# Altium PCB PCB1.PcbDoc
Units mil, origin at the board's own origin, x right, y up, seen from the top; angles counter-clockwise.
Board outline 8325 x 3160 mil, 2 copper layers (Top Layer, Bottom Layer); 381 components, 240 nets, 1579 pads, 6 vias.
Unrouted connection lines stored in the file: 1014.
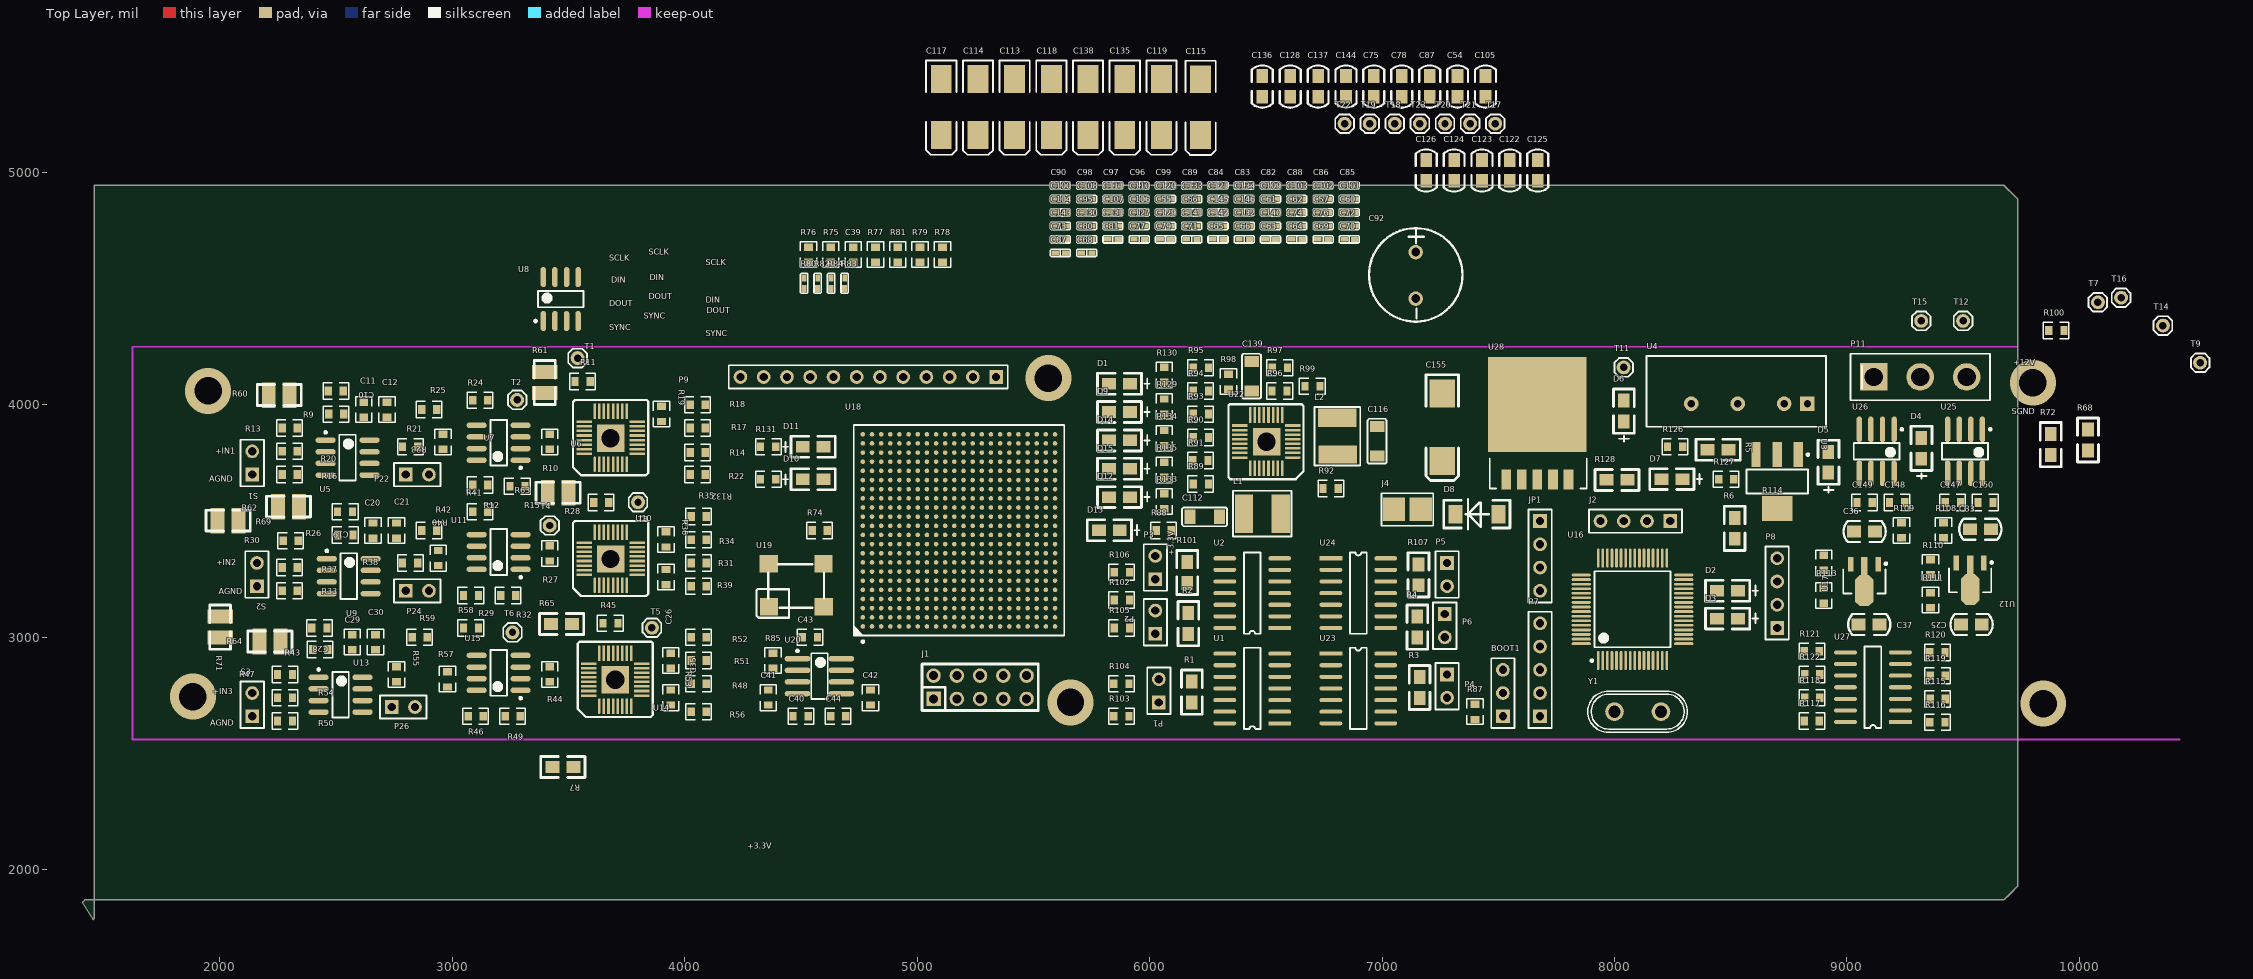
[diagram p0: Top Layer view]
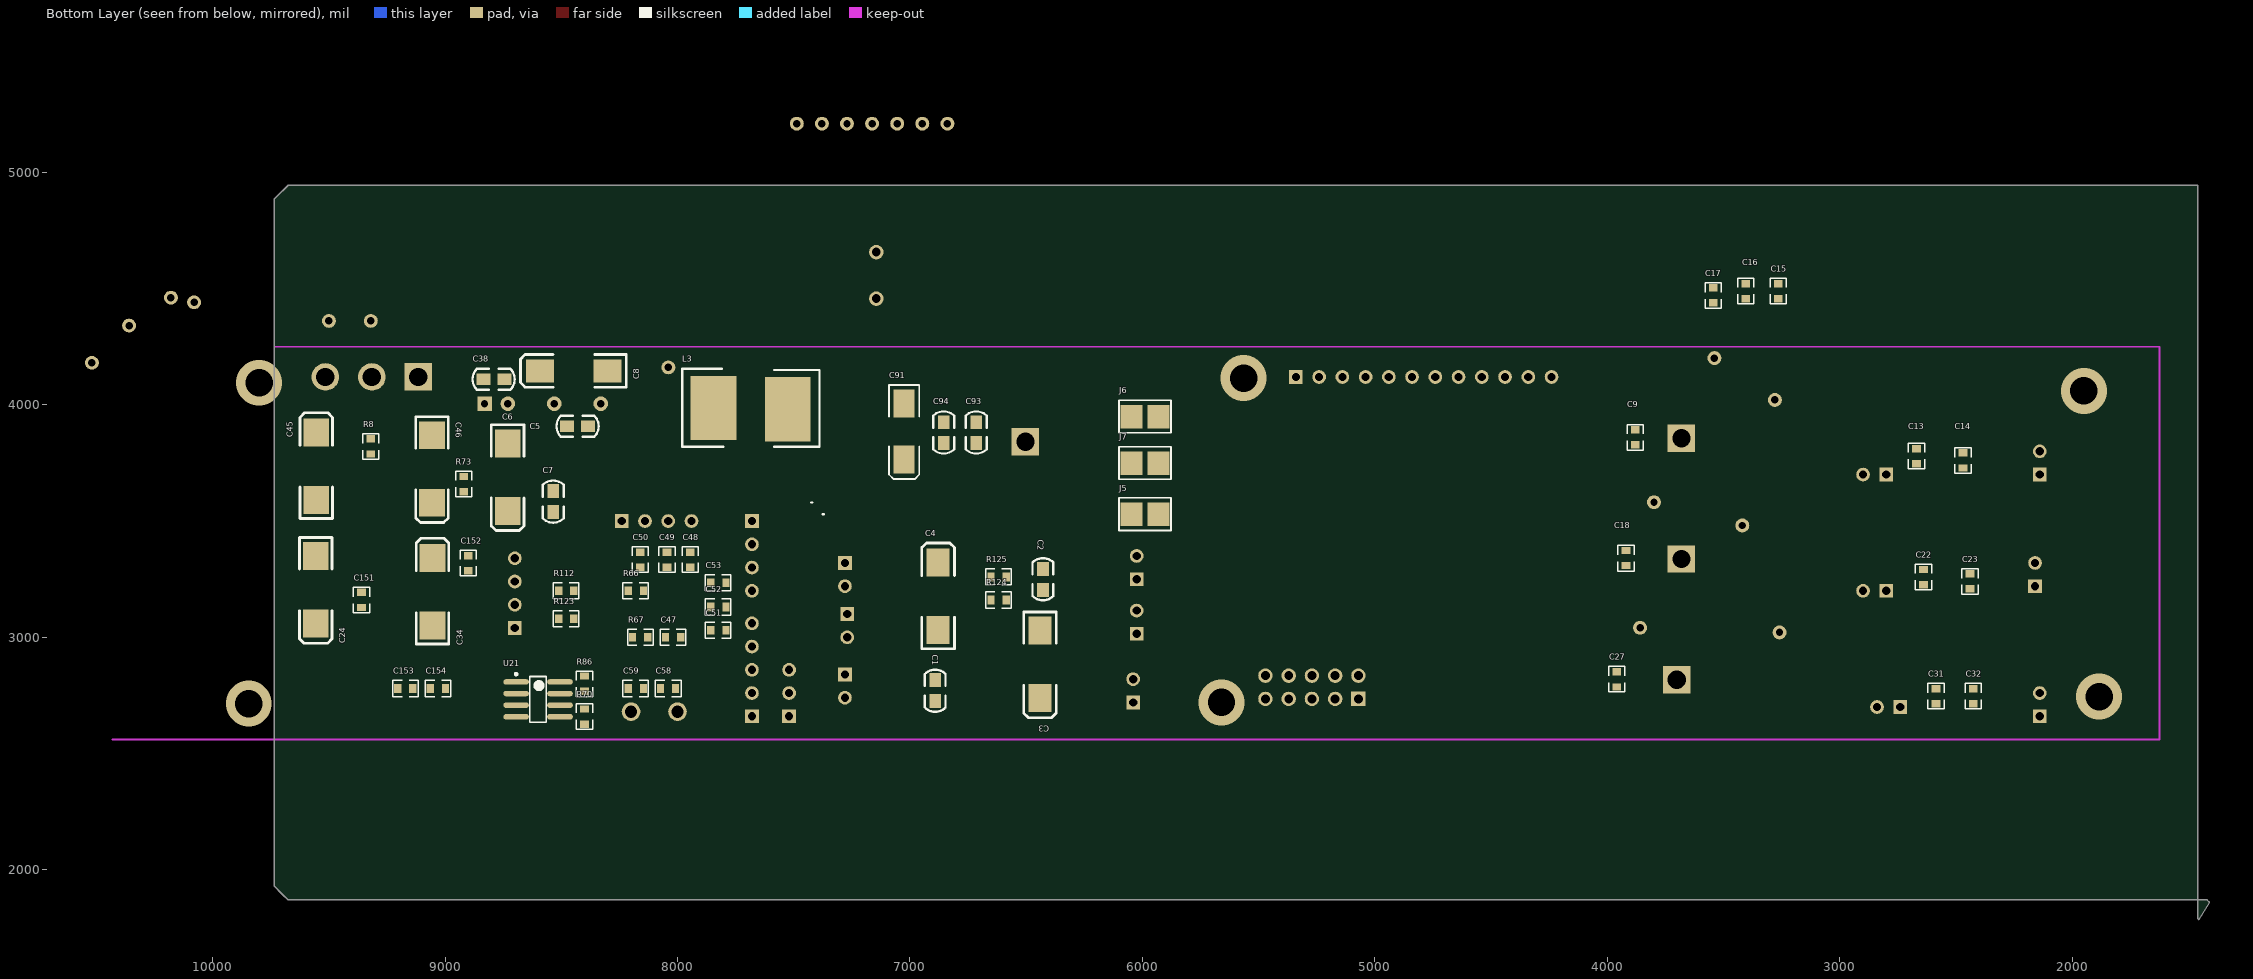
[diagram p1: Bottom Layer view, seen from below]

## Layer stack, top to bottom
Top Layer: signal copper 1.4
Dielectric: dielectric 12.6, FR-4, Dk 4.8
Bottom Layer: signal copper 1.4

## Board outline
1455,1785 1460,1790 1460,4945 9675,4945 9725,4895 9735,4885 9735,3355 9735,1930 9700,1895 9675,1870 8915,1870 1420,1870 1410,1860

## Design rules (kind name [scope] priority, off if disabled: settings)
Clearance [All] p1: gap=10
PolygonConnect [All] p1: connectstyle=Relief reliefconductorwidth=10 reliefentries=4 polygonreliefangle="90 Angle"
RoutingVias [All] p1: holewidth=28 width=50 viastyle="Through Hole" minholewidth=14 minwidth=28 maxholewidth=28 maxwidth=50
SilkToSilkClearance [All] p1 off: silktosilkclearance=10
SilkscreenOverComponentPads [All] p1 off: minsilkscreentomaskgap=10
SolderMaskExpansion [All] p1: expansion=4
Width [All] p1: maxlimit=100 minlimit=8 preferedwidth=10
26 further rules are at their usual default settings.

## Classes and differential pairs
component class 485Driver_MAX3462: C1 C2 C3 C4 P1 P2 P3 P4 P5 P6 R1 R2 R3 R4 R101 R102 R103 R104 R105 R106 R107 R124 R125 R? U1 U2 U23 U24
component class EP3CE75F484: C39 C40 C41 C42 C43 C44 D1 D9 D10 D11 D12 D13 D14 D15 J1 P9 R74 R75 R76 R77 R78 R79 R80 R81 R82 R83 R84 R85 R88 R129 R130 R131 R132 R133 R134 R135 T12 T14 T15 T16 U18 U19 U20
component class CH1_CH2: C9 C10 C11 C12 C13 C14 C15 C16 C17 C18 C19 C20 C21 C22 C23 C26 P22 P23 P24 P25 R9 R10 R11 R12 R13 R14 R15 R16 R17 R18 R19 R20 R21 R22 R23 R24 R25 R26 R27 R28 R29 R30 R31 R32 R33 R34 R35 R36 R37 R38 R39 R40 R41 R42 S1 S2 T1 T2 T3 T4 U5 U6 U7 U8 U9 U10 U11
component class CH3: C27 C28 C29 C30 C31 C32 C35 P26 P27 R43 R44 R45 R46 R47 R48 R49 R50 R51 R52 R53 R54 R55 R56 R57 R58 R59 S3 T5 T6 U13 U14 U15
component class Power: C5 C6 C7 C8 C24 C25 C33 C34 C36 C37 C38 C45 C46 C147 C148 C149 C150 C155 D4 D5 D6 D7 D8 L3 P11 R5 R6 R7 R8 R60 R61 R62 R63 R64 R65 R68 R69 R71 R72 R73 R108 R109 R126 R127 R128 T7 T9 T10 T11 U3 U4 U12 U17 U25 U26 U28
component class STM32F103RBT6: BOOT1 C47 C48 C49 C50 C51 C52 C53 C58 C59 C151 C152 C153 C154 D2 D3 J2 J3 JP1 P7 P8 R66 R67 R70 R86 R87 R110 R111 R112 R113 R114 R115 R116 R117 R118 R119 R120 R121 R122 R123 U16 U21 U27 Y1
component class FPGA_POWER: C54 C55 C56 C57 C60 C61 C62 C63 C64 C65 C66 C67 C68 C69 C70 C71 C72 C73 C74 C75 C76 C77 C78 C79 C80 C81 C82 C83 C84 C85 C86 C87 C88 C89 C90 C91 C92 C93 C94 C95 C96 C97 C98 C99 C100 C101 C102 C103 C104 C105 C106 C107 C108 C109 C110 C111 C112 C113 C114 C115 C116 C117 C118 C119 C120 C121 C122 C123 C124 C125 C126 C127 C128 C129 C130 C131 C132 C133 C134 C135 C136 C137 C138 C139 C140 C141 C142 C143 C144 C145 C146 J4 J5 J6 J7 J? L1 L2 L? R89 R90 R91 R92 R93 R94 R95 R96 R97 R98 R99 R100 T17 T18 T19 T20 T21 T22 T23 T? U22 U?

## Components (designator, comment, footprint, x,y, rotation, side; value= is the part's Value field where it differs from the comment)
BOOT1 "" HDR1X3 7520,2660 r90 top
C1 "104" 0805C#1 6900,2780 r180 bottom
C2 "104" 0805C#1 6420,3240 r0 bottom
C3 "10uF" C68uF#1 6420,2880 r90 bottom
C4 "10uF" C68uF#1 6900,3180 r270 bottom
C5 "104" 0805C#1 8440,3900 r90 bottom
C6 "10uF" C68uF#2 8710,3685 r90 bottom
C7 "104" 0805C#2 8530,3585 r180 bottom
C8 "10uF" C68uF#1 8450,4125 r180 bottom
C9 "104" 0603 3880,3860 r0 bottom
C10 "10pF" 0603 2500,4060 r270 top
C11 "10pF" 0603 2620,3980 r0 top
C12 "50pF" 0603 2720,3980 r0 top
C13 "104" 0603 2670,3780 r180 bottom
C14 "104" 0603 2470,3760 r0 bottom
C15 "106" 0603 3265,4490 r180 bottom
C16 "104" 0603 3405,4490 r180 bottom
C17 "106" 0603 3545,4470 r0 bottom
C18 "104" 0603 3920,3340 r0 bottom
C19 "10pF" 0603 2540,3540 r270 top
C20 "10pF" 0603 2660,3460 r0 top
C21 "50pF" 0603 2760,3460 r0 top
C22 "104" 0603 2640,3260 r180 bottom
C23 "104" 0603 2440,3240 r0 bottom
C24 "10uF" C68uF#2 9535,3200 r90 bottom
C25 "104" 0805C#2 9535,3060 r90 top
C26 "106" 0603 3920,3260 r0 top
C27 "104" 0603 3960,2820 r180 bottom
C28 "10pF" 0603 2430,3040 r270 top
C29 "10pF" 0603 2570,2980 r0 top
C30 "50pF" 0603 2670,2980 r0 top
C31 "104" 0603 2586.08,2746.98 r180 bottom
C32 "104" 0603 2426.08,2746.98 r180 bottom
C33 "104" 0805C#2 9575,3460 r270 top
C34 "10uF" C68uF#2 9075,3200 r270 bottom
C35 "106" 0603 3940,2900 r0 top
C36 "104" 0805C#2 9075,3460 r90 top
C37 "104" 0805C#2 9095,3060 r90 top
C38 "104" 0805C#2 8790,4105 r270 bottom
C39 "104" 0603 4725,4647 r0 top
C40 "104" 0603 4500,2660 r270 top
C41 "100" 0603 4360,2740 r180 top
C42 "100" 0603 4800,2740 r180 top
C43 "100" 0603 4540,3000 r270 top
C44 "100" 0603 4660,2660 r90 top
C45 "10uF" C68uF#2 9575,3740 r270 bottom
C46 "10uF" C68uF#2 9035,3720 r90 bottom
C47 "104" 0603 8020,3000 r90 bottom
C48 "104" 0603 7945,3335 r180 bottom
C49 "104" 0603 8045,3335 r180 bottom
C50 "104" 0603 8160,3335 r180 bottom
C51 "104" 0603 7825,3030 r90 bottom
C52 "104" 0603 7825,3130 r90 bottom
C53 "104" 0603 7825,3235 r90 bottom
C54 "104" 0805C#2 7329.94,5370.44 r0 top
C55 "104" 0402C 6068.5,4828.73 r0 top
C56 "104" 0402C 6181.5,4828.73 r0 top
C57 "104" 0402C 6746.5,4828.73 r0 top
C58 "22p" 0603 8040,2780 r270 bottom
C59 "22p" 0603 8180,2780 r90 bottom
C60 "104" 0402C 6859.5,4828.73 r0 top
C61 "104" 0402C 6520.5,4828.73 r0 top
C62 "104" 0402C 6633.5,4828.73 r0 top
C63 "104" 0402C 6520.5,4712.73 r0 top
C64 "104" 0402C 6633.5,4712.73 r0 top
C65 "104" 0402C 6294.5,4712.73 r0 top
C66 "104" 0402C 6407.5,4712.73 r0 top
C67 "104" 0402C 5616.5,4654.73 r0 top
C68 "104" 0402C 5729.5,4654.73 r0 top
C69 "104" 0402C 6746.5,4712.73 r0 top
C70 "104" 0402C 6859.5,4712.73 r0 top
C71 "104" 0402C 6181.5,4712.73 r0 top
C72 "104" 0402C 6859.5,4770.73 r0 top
C73 "104" 0402C 5616.5,4712.73 r0 top
C74 "104" 0402C 6633.5,4770.73 r0 top
C75 "104" 0805C#2 6969.94,5370.44 r0 top
C76 "104" 0402C 6746.5,4770.73 r0 top
C77 "104" 0402C 5955.5,4712.73 r0 top
C78 "104" 0805C#2 7089.94,5370.44 r0 top
C79 "104" 0402C 6068.5,4712.73 r0 top
C80 "104" 0402C 5729.5,4712.73 r0 top
C81 "104" 0402C 5842.5,4712.73 r0 top
C82 "104" 0402C 6520.5,4944.73 r0 top
C83 "104" 0402C 6407.5,4944.73 r0 top
C84 "104" 0402C 6294.5,4944.73 r0 top
C85 "104" 0402C 6859.5,4944.73 r0 top
C86 "104" 0402C 6746.5,4944.73 r0 top
C87 "104" 0805C#2 7209.94,5370.44 r0 top
C88 "104" 0402C 6633.5,4944.73 r0 top
C89 "104" 0402C 6181.5,4944.73 r0 top
C90 "104" 0402C 5616.5,4944.73 r0 top
C91 "68uF16V" 6032 7020,3880 r90 bottom
C92 "220uF" c200 7140,4580 r0 top
C93 "104" 0805C#2 6720,3880 r0 bottom
C94 "104" 0805C#2 6860,3880 r0 bottom
C95 "104" 0402C 5729.5,4828.73 r0 top
C96 "104" 0402C 5955.5,4944.73 r0 top
C97 "104" 0402C 5842.5,4944.73 r0 top
C98 "104" 0402C 5729.5,4944.73 r0 top
C99 "104" 0402C 6068.5,4944.73 r0 top
C100 "104" 0402C 5616.5,4886.73 r0 top
C101 "104" 0402C 6859.5,4886.73 r0 top
C102 "104" 0402C 6746.5,4886.73 r0 top
C103 "104" 0402C 6633.5,4886.73 r0 top
C104 "104" 0402C 5616.5,4828.73 r0 top
C105 "104" 0805C#2 7449.94,5370.44 r0 top
C106 "104" 0402C 5955.5,4828.73 r0 top
C107 "104" 0402C 5842.5,4828.73 r0 top
C108 "104" 0402C 5729.5,4886.73 r0 top
C109 "104" 0402C 6520.5,4886.73 r0 top
C110 "104" 0402C 5955.5,4886.73 r0 top
C111 "104" 0402C 5842.5,4886.73 r0 top
C112 "226" C226 6240,3520 r0 top
C113 "68uF16V" 6032 5425.05,5275.64 r90 top
C114 "68uF16V" 6032 5267.17,5275.64 r90 top
C115 "68uF16V" 6032 6225,5275 r90 top
C116 "226" C226 6980,3840 r270 top
C117 "68uF16V" 6032 5109.3,5275.64 r90 top
C118 "68uF16V" 6032 5582.92,5275.64 r90 top
C119 "68uF16V" 6032 6056.54,5275.64 r90 top
C120 "104" 0402C 6068.5,4886.73 r0 top
C121 "104" 0402C 6294.5,4886.73 r0 top
C122 "104" 0805C#2 7554.94,5009.16 r0 top
C123 "104" 0805C#2 7434.94,5009.16 r0 top
C124 "104" 0805C#2 7314.94,5009.16 r0 top
C125 "104" 0805C#2 7674.94,5009.16 r0 top
C126 "104" 0805C#2 7194.94,5009.16 r0 top
C127 "104" 0402C 5955.5,4770.73 r0 top
C128 "104" 0805C#2 6609.94,5370.44 r0 top
C129 "104" 0402C 6068.5,4770.73 r0 top
C130 "104" 0402C 5729.5,4770.73 r0 top
C131 "104" 0402C 5842.5,4770.73 r0 top
C132 "104" 0402C 6407.5,4770.73 r0 top
C133 "104" 0402C 6181.5,4886.73 r0 top
C134 "104" 0402C 6407.5,4886.73 r0 top
C135 "68uF16V" 6032 5898.67,5275.64 r90 top
C136 "104" 0805C#2 6489.94,5370.44 r0 top
C137 "104" 0805C#2 6729.94,5370.44 r0 top
C138 "68uF16V" 6032 5740.8,5275.64 r90 top
C139 "226" C226 6440,4120 r270 top
C140 "104" 0402C 6520.5,4770.73 r0 top
C141 "104" 0402C 6181.5,4770.73 r0 top
C142 "104" 0402C 6294.5,4770.73 r0 top
C143 "104" 0402C 5616.5,4770.73 r0 top
C144 "104" 0805C#2 6849.94,5370.44 r0 top
C145 "104" 0402C 6294.5,4828.73 r0 top
C146 "104" 0402C 6407.5,4828.73 r0 top
C147 "102" 0603 9455,3580 r90 top
C148 "104" 0603 9215,3580 r90 top
C149 "102" 0603 9075,3580 r90 top
C150 "104" 0603 9595,3580 r90 top
C151 "Cap" 0603 9360,3160 r0 bottom
C152 "Cap" 0603 8900,3320 r180 bottom
C153 "104" 0603 9170,2780 r270 bottom
C154 "104" 0603 9030,2780 r270 bottom
C155 "68uF" C68uF#2 7280,3900 r90 top
D1 "LED" 0805_LED 5884.07,4090.64 r180 top
D2 "LED" 0805_LED 8500,3200 r180 top
D3 "LED" 0805_LED 8500,3080 r180 top
D4 "LED" 0805_LED 9320,3800 r90 top
D5 "LED" 0805_LED 8920,3740 r90 top
D6 "LED" 0805_LED 8040,3960 r90 top
D7 "LED" 0805_LED 8260,3680 r180 top
D8 "IN5824" 1N5824 7400,3520 r180 top
D9 "LED" 0805_LED 5884.07,3968.64 r180 top
D10 "LED" 0805_LED 4540,3680 r0 top
D11 "LED" 0805_LED 4540,3820 r0 top
D12 "LED" 0805_LED 5884.07,3602.64 r180 top
D13 "LED" 0805_LED 5840,3460 r180 top
D14 "LED" 0805_LED 5884.07,3846.64 r180 top
D15 "LED" 0805_LED 5884.07,3724.64 r180 top
J1 "JTAG" IDC10 5300,2780 r180 top
J2 "CON4" HDR1X4 8240,3500 r180 top
J4 "" I_ON1 7100,3560 r90 top
J5 "" I_ON1 5980,3520 r270 bottom
J6 "" I_ON1 5980,3940 r270 bottom
J7 "" I_ON1 5980,3740 r270 bottom
JP1 "" HDR1X4 7680,3500 r270 top
L1 "3.3uH" L3R3 6480,3540 r0 top
L2 "3.3uH" L3R3 6800,3860 r90 top
L3 "100uH" L100uH 7680,3980 r180 bottom
P1 "Header 2H" HDR1X2 6040,2720 r90 top
P2 "Header 2H" HDR1X2 6025,3015 r90 top
P3 "Header 2H" HDR1X2 6025,3250 r90 top
P4 "Header 2H" HDR1X2 7280,2840 r270 top
P5 "Header 2H" HDR1X2 7280,3320 r270 top
P6 "Header 2H" HDR1X2 7270,3100 r270 top
P7 "Header 5" HDR1X5 7680,2660 r90 top
P8 "Header 4" HDR1X4 8700,3040 r90 top
P9 "Header 12" HDR1X12 5340,4120 r180 top
P11 "POWER" SIP3-5.08mm 9115,4120 r0 top
P22 "Header 2H" HDR1X2 2800,3700 r0 top
P24 "Header 2H" HDR1X2 2800,3200 r0 top
P26 "Header 2H" HDR1X2 2740,2700 r0 top
R1 "100" 0805R#1 6180,2740 r180 top
R2 "100" 0805R#1 6165,3035 r180 top
R3 "100" 0805R#1 7160,2760 r180 top
R4 "100" 0805R#1 7150,3020 r180 top
R5 "000" 0805R#1 8470,3805 r270 top
R6 "000" 0805R#2 8520,3480 r0 top
R7 "000" 0805R#1 3500,2440 r270 top
R8 "Res2" 0603 9320,3820 r0 bottom
R9 "1001" 0603 2500,3960 r90 top net-tie
R10 "1001" 0603 3420,3840 r180 top net-tie
R11 "000" 0603 3560,4100 r90 top net-tie
R12 "1001" 0603 3120,3655 r90 top net-tie
R13 "10R" 0603 2300,3900 r90 top
R14 "000" 0603 4055,3795 r90 top net-tie
R15 "4.99K" 0603 3280,3650 r90 top net-tie
R16 "0R" 0603 2300,3700 r90 top
R17 "000" 0603 4055,3900 r90 top net-tie
R18 "000" 0603 4055,4000 r90 top net-tie
R19 "000" 0603 3900,3960 r180 top net-tie
R20 "1001" 0603 2300,3800 r90 top net-tie
R21 "825" 0603 2820,3820 r270 top net-tie
R22 "000" 0603 4055,3700 r90 top net-tie
R23 "825" 0603 2960,3840 r180 top net-tie
R24 "000" 0603 3120,4020 r90 top net-tie
R25 "100" 0603 2900,3980 r90 top net-tie
R26 "1001" 0603 2540,3440 r90 top net-tie
R27 "1001" 0603 3420,3360 r180 top net-tie
R28 "000" 0603 3640,3580 r90 top net-tie
R29 "1001" 0603 3080,3180 r90 top net-tie
R30 "10R" 0603 2305,3415 r90 top net-tie
R31 "000" 0603 4060,3320 r90 top net-tie
R32 "4.99K" 0603 3240,3180 r90 top net-tie
R33 "0R" 0603 2300,3200 r90 top net-tie
R34 "000" 0603 4060,3420 r90 top net-tie
R35 "000" 0603 4060,3520 r90 top net-tie
R36 "000" 0603 3920,3420 r180 top net-tie
R37 "1001" 0603 2300,3300 r90 top net-tie
R38 "825" 0603 2820,3320 r270 top net-tie
R39 "000" 0603 4060,3220 r90 top net-tie
R40 "825" 0603 2940,3340 r180 top net-tie
R41 "000" 0603 3120,3540 r90 top net-tie
R42 "100" 0603 2900,3460 r90 top net-tie
R43 "1001" 0603 2431.08,2946.98 r90 top net-tie
R44 "1001" 0603 3420,2840 r180 top net-tie
R45 "000" 0603 3680,3060 r90 top net-tie
R46 "1001" 0603 3100,2660 r90 top net-tie
R47 "10R" 0603 2280,2840 r90 top
R48 "000" 0603 4060,2800 r90 top net-tie
R49 "4.99K" 0603 3260,2660 r90 top net-tie
R50 "0R" 0603 2280,2640 r90 top
R51 "000" 0603 4060,2900 r90 top net-tie
R52 "000" 0603 4060,3000 r90 top net-tie
R53 "000" 0603 3940,2740 r180 top net-tie
R54 "1001" 0603 2280,2740 r90 top net-tie
R55 "825" 0603 2760,2840 r180 top net-tie
R56 "000" 0603 4060,2680 r90 top net-tie
R57 "825" 0603 2980,2820 r0 top net-tie
R58 "000" 0603 3080,3040 r90 top net-tie
R59 "100" 0603 2860,3000 r90 top net-tie
R60 "000" 0805R#3 2280,4040 r270 top
R61 "000" 0805R#3 3400,4120 r0 top
R62 "000" 0805R#3 2320,3560 r270 top
R63 "000" 0805R#3 3480,3620 r270 top
R64 "000" 0805R#3 2240,2980 r270 top
R65 "000" 0805R#2 3460,3060 r90 top
R66 "0" 0603 8180,3200 r90 bottom
R67 "10k" 0603 8160,3000 r270 bottom
R68 "000" 0805R#2 10040,3860 r0 top
R69 "000" 0805R#3 2060,3500 r270 top
R70 "4.7K" 0603 8400,2660 r180 bottom
R71 "000" 0805R#3 2000,3020 r180 top
R72 "000" 0805R#2 9880,3840 r0 top
R73 "Res2" 0603 8920,3660 r180 bottom
R74 "0" 0603 4580,3460 r90 top
R75 "0" 0603 4629,4647 r0 top
R76 "1001" 0603 4533,4647 r0 top
R77 "1001" 0603 4821,4647 r0 top
R78 "1001" 0603 5109,4647 r0 top
R79 "1002" 0603 5013,4647 r0 top
R80 "1002" 0402 4511.5,4518.5 r90 top
R81 "1002" 0603 4917,4647 r0 top
R82 "1002" 0402 4569.5,4518.5 r90 top
R83 "1002" 0402 4685.5,4518.5 r90 top
R84 "1002" 0402 4627.5,4518.5 r90 top
R85 "25R0" 0603 4380,2900 r0 top
R86 "4.7K" 0603 8400,2800 r0 bottom
R87 "10k" 0603 7400,2680 r0 top
R88 "Res2" 0603 6060,3460 r90 top
R89 "1001" 0603 6220,3660 r90 top
R90 "9102" 0603 6220,3860 r90 top
R91 "2002" 0603 6220,3760 r270 top
R92 "1001" 0603 6780,3640 r270 top
R93 "1001" 0603 6220,3960 r90 top
R94 "1001" 0603 6220,4060 r90 top
R95 "1001" 0603 6220,4160 r90 top
R96 "1503" 0603 6560,4060 r270 top
R97 "1002" 0603 6560,4160 r90 top
R98 "1001" 0603 6340,4100 r0 top
R99 "1003" 0603 6700,4080 r90 top
R100 "1001" 0603 9900,4320 r90 top
R101 "100" 0805R#2 6165,3290 r0 top
R102 "100" 0603 5880,3160 r90 top
R103 "100" 0603 5880,2660 r270 top
R104 "100" 0603 5880,2800 r270 top
R105 "100" 0603 5880,3040 r90 top
R106 "100" 0603 5880,3280 r90 top
R107 "100" 0805R#2 7160,3280 r0 top
R108 "000" 0603 9415,3460 r180 top net-tie
R109 "000" 0603 9235,3460 r180 top net-tie
R110 "Res2" 0603 9360,3300 r180 top
R111 "Res2" 0603 9360,3160 r0 top
R112 "Res2" 0603 8480,3200 r90 bottom
R113 "Res2" 0603 8900,3180 r0 top
R114 "Res2" 0603 8900,3320 r180 top
R115 "Res2" 0603 9390,2735 r90 top
R116 "Res2" 0603 9390,2635 r270 top
R117 "Res2" 0603 8850,2640 r270 top
R118 "Res2" 0603 8850,2740 r90 top
R119 "Res2" 0603 9390,2835 r90 top
R120 "Res2" 0603 9390,2935 r270 top
R121 "Res2" 0603 8850,2940 r270 top
R122 "Res2" 0603 8850,2840 r90 top
R123 "Res2" 0603 8480,3080 r90 bottom
R124 "1001" 0603 6620,3160 r90 bottom
R125 "1001" 0603 6620,3260 r90 bottom
R126 "Res2" 0603 8260,3820 r90 top
R127 "Res2" 0603 8480,3680 r90 top
R128 "000" 0805R#2 8000,3680 r90 top
R129 "Res2" 0603 6063.07,3992 r180 top
R130 "Res2" 0603 6063.07,4128 r180 top
R131 "Res2" 0603 4360,3820 r270 top
R132 "Res2" 0603 4360,3680 r270 top
R133 "Res2" 0603 6063.07,3584 r180 top
R134 "Res2" 0603 6063.07,3856 r180 top
R135 "Res2" 0603 6063.07,3720 r180 top
S1 "Sensor" HDR1X2 2140,3700 r90 top
S2 "Sensor" HDR1X2 2160,3220 r90 top
S3 "Sensor" HDR1X2 2140,2660 r90 top
T1 "TEST" TEST#1 3540,4200 r0 top
T2 "TEST" TEST#1 3280,4020 r0 top
T3 "TEST" TEST#1 3800,3580 r0 top
T4 "TEST" TEST#1 3420,3480 r0 top
T5 "TEST" TEST#1 3860,3040 r0 top
T6 "TEST" TEST#1 3260,3020 r0 top
T7 "AGND" TEST#2 10080,4440 r0 top
T9 "+3.3V" TEST#2 10520,4180 r0 top
T11 "GND_D" TEST#2 8040,4160 r0 top
T12 "" TEST#2 9500,4360 r0 top
T14 "" TEST#2 10360,4340 r0 top
T15 "" TEST#2 9320,4360 r0 top
T16 "" TEST#2 10180,4460 r0 top
T17 "+1.2V" TEST#2 7487.52,5208.69 r0 top
T18 "+1.2V" TEST#2 7055.52,5208.69 r0 top
T19 "+3.3V" TEST#2 6947.52,5208.69 r0 top
T20 "+3.3V" TEST#2 7271.52,5208.69 r0 top
T21 "+2.5V" TEST#2 7379.52,5208.69 r0 top
T22 "DGND" TEST#2 6839.52,5208.69 r0 top
T23 "DGND" TEST#2 7163.52,5208.69 r0 top
U1 "MAX3461" SOP14 6560,2630 r180 top
U2 "MAX3461" SOP14 6560,3040 r180 top
U3 "LM1117-3.3V" SOT223 8700,3670 r270 top
U4 "B1205S2W" B1205SW 8830,4005 r270 top
U5 "AD797" SO8#1 2550,3780 r270 top
U6 "AD7195" VQFN32 3700,3860 r270 top
U7 "ADA4041-1" SO8#1 3200,3830 r90 top
U8 "ADR421" SO8#1 3460,4455 r0 top
U9 "AD797" SO8#1 2555,3270 r270 top
U10 "AD7195" VQFN32 3700,3340 r270 top
U11 "ADA4041-1" SO8#1 3200,3360 r90 top
U12 "78L05" SOT89-M 9535,3260 r90 top
U13 "AD797" SO8#1 2520,2760 r270 top
U14 "AD7195" VQFN32 3720,2820 r270 top
U15 "ADA4041-1" SO8#1 3200,2840 r90 top
U16 "STM32F103RBT6" LQFP64_M 8080,3120 r180 top
U17 "79L05" SOT89M 9075,3240 r270 top
U18 "EP4CE75F23I7" FBGA484 5180,3460 r0 top
U19 "50MHz" CLOCK4 4480,3220 r270 top
U20 "EPCS16SI8N" SO8#2 4580,2840 r270 top
U21 "24LC64" SO8#2 8600,2740 r270 bottom
U22 "TPS650243RHBR" VQFN32 6500,3860 r0 top
U23 "MAX3461" SOP14 6780,2930 r0 top
U24 "MAX3461" SOP14 6780,3340 r0 top
U25 "ACS712" SO8#2 9515,3800 r180 top
U26 "ACS712" SO8#2 9135,3800 r180 top
U27 "OPA4277" SOP14 9230,2635 r180 top
U28 "LM2576-5" lm2596 7680,3900 r0 top
Y1 "" XTAL_8M 8100,2680 r180 top

## Footprints (in the part's own frame and the unit in brackets; to place one, negate y for a bottom-side part, rotate by r counter-clockwise, add the part's x,y. Pads: shape width x height; smd on the part's side, far side on the other; paste and mask are expansions set on the pad)
1N5824 [mil]
  rect 60x80 smd: 1(-101,-10) 2(84,-10)
  silkscreen extent -151,-75 134,55
0402 [mm]
  rect 0.8x0.5 smd: 1(-0.468,-0.056) 2(0.682,-0.066)
  silkscreen extent -0.99,-0.46 1.19,0.33
0402C [mm]
  rect 0.8x0.5 smd: 1(-0.57,-0.025) 2(0.58,-0.035)
  silkscreen extent -1.09,-0.43 1.09,0.36
0603 [mm]
  rect 0.96x0.8 smd: 1(0,0.8) 2(0,-0.85)
  silkscreen extent -0.89,-1.4 0.89,1.4
0805_LED [mil]
  rect 60x50 smd: 1(-31.93,-0.36) 2(58.07,-0.36)
  silkscreen extent -117,-45 108,45
0805C#1 [mil]
  rect 50x60 smd: 1(8.08,-54) 2(8.08,36)
  silkscreen extent -37,-101 53,81
0805C#2 [mil]
  rect 50x60 smd: 1(-4.94,-45.08) 2(-4.94,44.92)
  silkscreen extent -50,-92 40,90
0805R#1 [mil]
  rect 50x60 smd: 1(-1.98,21.08) 2(-1.98,-68.92)
  silkscreen extent -47,-119 43,71
0805R#2 [mil]
  rect 50x60 smd: 1(-3.02,-56.08) 2(-3.02,33.92)
  silkscreen extent -48,-106 42,84
0805R#3 [mil]
  rect 110.24x60 smd: 1(-1.98,21.08) 2(-1.98,-68.92)
  silkscreen extent -47,-119 43,71
6032 [mil]
  rect 120x90 smd: 1(-114.57,5.36) 2(125.43,5.36)
  silkscreen extent -200,-60 205,70
B1205SW [mm]
  rect 1.6x1.6 hole 0.8: 1(0,0)
  round 1.6 hole 0.8: 2(0,-2.54) 4(0,-7.62) 6(0,-12.7)
  silkscreen extent -5.21,-17.6 2.54,2.03
C68uF#1 [mil]
  rect 120x100 smd: 1(-141,21) 2(149,21)
  silkscreen extent -226,-49 229,91
C68uF#2 [mil]
  rect 120x110.24 smd: 1(-141,21) 2(149,21)
  silkscreen extent -226,-49 229,91
c200 [mil]
  round 62 hole 38: 1(5,77) 2(5,-123)
  silkscreen extent -196,-222 206,180
C226 [mm]
  rect 1.2x1.6 smd: 1(1.524,-0.025) 2(-1.676,-0.025)
  silkscreen extent -2.54,-1.07 2.36,0.99
CLOCK4 [mm]
  rect 1.905x2 smd: 1(2.263,-2.962) 2(2.263,3.007) 3(-2.461,2.981) 4(-2.461,-2.988)
  silkscreen extent -2.38,-4.34 3.45,3.03
FBGA484 [mm]
  round 0.5 smd: A1(-10.5,-10.5) A2(-10.5,-9.5) A3(-10.5,-8.5) A4(-10.5,-7.5) A5(-10.5,-6.5) A6(-10.5,-5.5) A7(-10.5,-4.5) A8(-10.5,-3.5) A9(-10.5,-2.5) A10(-10.5,-1.5) A11(-10.5,-0.5) A12(-10.5,0.5) A13(-10.5,1.5) A14(-10.5,2.5) A15(-10.5,3.5) A16(-10.5,4.5) A17(-10.5,5.5) A18(-10.5,6.5) A19(-10.5,7.5) A20(-10.5,8.5) A21(-10.5,9.5) A22(-10.5,10.5) AA1(9.5,-10.5) AA2(9.5,-9.5) AA3(9.5,-8.5) AA4(9.5,-7.5) AA5(9.5,-6.5) AA6(9.5,-5.5) AA7(9.5,-4.5) AA8(9.5,-3.5) AA9(9.5,-2.5) AA10(9.5,-1.5) AA11(9.5,-0.5) AA12(9.5,0.5) AA13(9.5,1.5) AA14(9.5,2.5) AA15(9.5,3.5) AA16(9.5,4.5) AA17(9.5,5.5) AA18(9.5,6.5) AA19(9.5,7.5) AA20(9.5,8.5) AA21(9.5,9.5) AA22(9.5,10.5) AB1(10.5,-10.5) AB2(10.5,-9.5) AB3(10.5,-8.5) AB4(10.5,-7.5) AB5(10.5,-6.5) AB6(10.5,-5.5) AB7(10.5,-4.5) AB8(10.5,-3.5) AB9(10.5,-2.5) AB10(10.5,-1.5) AB11(10.5,-0.5) AB12(10.5,0.5) AB13(10.5,1.5) AB14(10.5,2.5) AB15(10.5,3.5) AB16(10.5,4.5) AB17(10.5,5.5) AB18(10.5,6.5) AB19(10.5,7.5) AB20(10.5,8.5) AB21(10.5,9.5) AB22(10.5,10.5) B1(-9.5,-10.5) B2(-9.5,-9.5) B3(-9.5,-8.5) B4(-9.5,-7.5) B5(-9.5,-6.5) B6(-9.5,-5.5) B7(-9.5,-4.5) B8(-9.5,-3.5) B9(-9.5,-2.5) B10(-9.5,-1.5) B11(-9.5,-0.5) B12(-9.5,0.5) B13(-9.5,1.5) B14(-9.5,2.5) B15(-9.5,3.5) B16(-9.5,4.5) B17(-9.5,5.5) B18(-9.5,6.5) B19(-9.5,7.5) B20(-9.5,8.5) B21(-9.5,9.5) B22(-9.5,10.5) C1(-8.5,-10.5) C2(-8.5,-9.5) C3(-8.5,-8.5) C4(-8.5,-7.5) C5(-8.5,-6.5) C6(-8.5,-5.5) C7(-8.5,-4.5) C8(-8.5,-3.5) C9(-8.5,-2.5) C10(-8.5,-1.5) C11(-8.5,-0.5) C12(-8.5,0.5) C13(-8.5,1.5) C14(-8.5,2.5) C15(-8.5,3.5) C16(-8.5,4.5) C17(-8.5,5.5) C18(-8.5,6.5) C19(-8.5,7.5) C20(-8.5,8.5) C21(-8.5,9.5) C22(-8.5,10.5) D1(-7.5,-10.5) D2(-7.5,-9.5) D3(-7.5,-8.5) D4(-7.5,-7.5) D5(-7.5,-6.5) D6(-7.5,-5.5) D7(-7.5,-4.5) D8(-7.5,-3.5) D9(-7.5,-2.5) D10(-7.5,-1.5) D11(-7.5,-0.5) D12(-7.5,0.5) D13(-7.5,1.5) D14(-7.5,2.5) D15(-7.5,3.5) D16(-7.5,4.5) D17(-7.5,5.5) D18(-7.5,6.5) D19(-7.5,7.5) D20(-7.5,8.5) D21(-7.5,9.5) D22(-7.5,10.5) E1(-6.5,-10.5) E2(-6.5,-9.5) E3(-6.5,-8.5) E4(-6.5,-7.5) E5(-6.5,-6.5) E6(-6.5,-5.5) E7(-6.5,-4.5) E8(-6.5,-3.5) E9(-6.5,-2.5) E10(-6.5,-1.5) E11(-6.5,-0.5) E12(-6.5,0.5) E13(-6.5,1.5) E14(-6.5,2.5) E15(-6.5,3.5) E16(-6.5,4.5) E17(-6.5,5.5) E18(-6.5,6.5) E19(-6.5,7.5) E20(-6.5,8.5) E21(-6.5,9.5) E22(-6.5,10.5) F1(-5.5,-10.5) F2(-5.5,-9.5) F3(-5.5,-8.5) F4(-5.5,-7.5) F5(-5.5,-6.5) F6(-5.5,-5.5) F7(-5.5,-4.5) F8(-5.5,-3.5) F9(-5.5,-2.5) F10(-5.5,-1.5) F11(-5.5,-0.5) F12(-5.5,0.5) F13(-5.5,1.5) F14(-5.5,2.5) F15(-5.5,3.5) F16(-5.5,4.5) F17(-5.5,5.5) F18(-5.5,6.5) F19(-5.5,7.5) F20(-5.5,8.5) F21(-5.5,9.5) F22(-5.5,10.5) G1(-4.5,-10.5) G2(-4.5,-9.5) G3(-4.5,-8.5) G4(-4.5,-7.5) G5(-4.5,-6.5) G6(-4.5,-5.5) G7(-4.5,-4.5) G8(-4.5,-3.5) G9(-4.5,-2.5) G10(-4.5,-1.5) G11(-4.5,-0.5) G12(-4.5,0.5) G13(-4.5,1.5) G14(-4.5,2.5) G15(-4.5,3.5) G16(-4.5,4.5) G17(-4.5,5.5) G18(-4.5,6.5) G19(-4.5,7.5) G20(-4.5,8.5) G21(-4.5,9.5) G22(-4.5,10.5) H1(-3.5,-10.5) H2(-3.5,-9.5) H3(-3.5,-8.5) H4(-3.5,-7.5) H5(-3.5,-6.5) H6(-3.5,-5.5) H7(-3.5,-4.5) H8(-3.5,-3.5) H9(-3.5,-2.5) H10(-3.5,-1.5) H11(-3.5,-0.5) H12(-3.5,0.5) H13(-3.5,1.5) H14(-3.5,2.5) H15(-3.5,3.5) H16(-3.5,4.5) H17(-3.5,5.5) H18(-3.5,6.5) H19(-3.5,7.5) H20(-3.5,8.5) H21(-3.5,9.5) H22(-3.5,10.5) J1(-2.5,-10.5) J2(-2.5,-9.5) J3(-2.5,-8.5) J4(-2.5,-7.5) J5(-2.5,-6.5) J6(-2.5,-5.5) J7(-2.5,-4.5) J8(-2.5,-3.5) J9(-2.5,-2.5) J10(-2.5,-1.5) J11(-2.5,-0.5) J12(-2.5,0.5) J13(-2.5,1.5) J14(-2.5,2.5) J15(-2.5,3.5) J16(-2.5,4.5) J17(-2.5,5.5) J18(-2.5,6.5) J19(-2.5,7.5) J20(-2.5,8.5) J21(-2.5,9.5) J22(-2.5,10.5) K1(-1.5,-10.5) K2(-1.5,-9.5) K3(-1.5,-8.5) K4(-1.5,-7.5) K5(-1.5,-6.5) K6(-1.5,-5.5) K7(-1.5,-4.5) K8(-1.5,-3.5) K9(-1.5,-2.5) K10(-1.5,-1.5) K11(-1.5,-0.5) K12(-1.5,0.5) K13(-1.5,1.5) K14(-1.5,2.5) K15(-1.5,3.5) K16(-1.5,4.5) K17(-1.5,5.5) K18(-1.5,6.5) K19(-1.5,7.5) K20(-1.5,8.5) K21(-1.5,9.5) K22(-1.5,10.5) L1(-0.5,-10.5) L2(-0.5,-9.5) L3(-0.5,-8.5) L4(-0.5,-7.5) L5(-0.5,-6.5) L6(-0.5,-5.5) L7(-0.5,-4.5) L8(-0.5,-3.5) L9(-0.5,-2.5) L10(-0.5,-1.5) L11(-0.5,-0.5) L12(-0.5,0.5) L13(-0.5,1.5) L14(-0.5,2.5) L15(-0.5,3.5) L16(-0.5,4.5) L17(-0.5,5.5) L18(-0.5,6.5) L19(-0.5,7.5) L20(-0.5,8.5) L21(-0.5,9.5) L22(-0.5,10.5) M1(0.5,-10.5) M2(0.5,-9.5) M3(0.5,-8.5) M4(0.5,-7.5) M5(0.5,-6.5) M6(0.5,-5.5) M7(0.5,-4.5) M8(0.5,-3.5) M9(0.5,-2.5) M10(0.5,-1.5) M11(0.5,-0.5) M12(0.5,0.5) M13(0.5,1.5) M14(0.5,2.5) M15(0.5,3.5) M16(0.5,4.5) M17(0.5,5.5) M18(0.5,6.5) M19(0.5,7.5) M20(0.5,8.5) M21(0.5,9.5) M22(0.5,10.5) N1(1.5,-10.5) N2(1.5,-9.5) N3(1.5,-8.5) N4(1.5,-7.5) N5(1.5,-6.5) N6(1.5,-5.5) N7(1.5,-4.5) N8(1.5,-3.5) N9(1.5,-2.5) N10(1.5,-1.5) N11(1.5,-0.5) N12(1.5,0.5) N13(1.5,1.5) N14(1.5,2.5) N15(1.5,3.5) N16(1.5,4.5) N17(1.5,5.5) N18(1.5,6.5) N19(1.5,7.5) N20(1.5,8.5) N21(1.5,9.5) N22(1.5,10.5) P1(2.5,-10.5) P2(2.5,-9.5) P3(2.5,-8.5) P4(2.5,-7.5) P5(2.5,-6.5) P6(2.5,-5.5) P7(2.5,-4.5) P8(2.5,-3.5) P9(2.5,-2.5) P10(2.5,-1.5) P11(2.5,-0.5) P12(2.5,0.5) P13(2.5,1.5) P14(2.5,2.5) P15(2.5,3.5) P16(2.5,4.5) P17(2.5,5.5) P18(2.5,6.5) P19(2.5,7.5) P20(2.5,8.5) P21(2.5,9.5) P22(2.5,10.5) R1(3.5,-10.5) R2(3.5,-9.5) R3(3.5,-8.5) R4(3.5,-7.5) R5(3.5,-6.5) R6(3.5,-5.5) R7(3.5,-4.5) R8(3.5,-3.5) R9(3.5,-2.5) R10(3.5,-1.5) R11(3.5,-0.5) R12(3.5,0.5) R13(3.5,1.5) R14(3.5,2.5) R15(3.5,3.5) R16(3.5,4.5) R17(3.5,5.5) R18(3.5,6.5) R19(3.5,7.5) R20(3.5,8.5) R21(3.5,9.5) R22(3.5,10.5) T1(4.5,-10.5) T2(4.5,-9.5) T3(4.5,-8.5) T4(4.5,-7.5) T5(4.5,-6.5) T6(4.5,-5.5) T7(4.5,-4.5) T8(4.5,-3.5) T9(4.5,-2.5) T10(4.5,-1.5) T11(4.5,-0.5) T12(4.5,0.5) T13(4.5,1.5) T14(4.5,2.5) T15(4.5,3.5) T16(4.5,4.5) T17(4.5,5.5) T18(4.5,6.5) T19(4.5,7.5) T20(4.5,8.5) T21(4.5,9.5) T22(4.5,10.5) U1(5.5,-10.5) U2(5.5,-9.5) U3(5.5,-8.5) U4(5.5,-7.5) U5(5.5,-6.5) U6(5.5,-5.5) U7(5.5,-4.5) U8(5.5,-3.5) U9(5.5,-2.5) U10(5.5,-1.5) U11(5.5,-0.5) U12(5.5,0.5) U13(5.5,1.5) U14(5.5,2.5) U15(5.5,3.5) U16(5.5,4.5) U17(5.5,5.5) U18(5.5,6.5) U19(5.5,7.5) U20(5.5,8.5) U21(5.5,9.5) U22(5.5,10.5) V1(6.5,-10.5) V2(6.5,-9.5) V3(6.5,-8.5) V4(6.5,-7.5) V5(6.5,-6.5) V6(6.5,-5.5) V7(6.5,-4.5) V8(6.5,-3.5) V9(6.5,-2.5) V10(6.5,-1.5) V11(6.5,-0.5) V12(6.5,0.5) V13(6.5,1.5) V14(6.5,2.5) V15(6.5,3.5) V16(6.5,4.5) V17(6.5,5.5) V18(6.5,6.5) V19(6.5,7.5) V20(6.5,8.5) V21(6.5,9.5) V22(6.5,10.5) W1(7.5,-10.5) W2(7.5,-9.5) W3(7.5,-8.5) W4(7.5,-7.5) W5(7.5,-6.5) W6(7.5,-5.5) W7(7.5,-4.5) W8(7.5,-3.5) W9(7.5,-2.5) W10(7.5,-1.5) W11(7.5,-0.5) W12(7.5,0.5) W13(7.5,1.5) W14(7.5,2.5) W15(7.5,3.5) W16(7.5,4.5) W17(7.5,5.5) W18(7.5,6.5) W19(7.5,7.5) W20(7.5,8.5) W21(7.5,9.5) W22(7.5,10.5) Y1(8.5,-10.5) Y2(8.5,-9.5) Y3(8.5,-8.5) Y4(8.5,-7.5) Y5(8.5,-6.5) Y6(8.5,-5.5) Y7(8.5,-4.5) Y8(8.5,-3.5) Y9(8.5,-2.5) Y10(8.5,-1.5) Y11(8.5,-0.5) Y12(8.5,0.5) Y13(8.5,1.5) Y14(8.5,2.5) Y15(8.5,3.5) Y16(8.5,4.5) Y17(8.5,5.5) Y18(8.5,6.5) Y19(8.5,7.5) Y20(8.5,8.5) Y21(8.5,9.5) Y22(8.5,10.5)
  silkscreen extent -11.5,-12.27 11.5,11.5, body extent -11.5,-11.5 11.5,11.5, height 2.6
HDR1X2 [mm] "Connector; Header; 2 Position"
  rect 1.5x1.5 hole 0.9: 1(0,0)
  round 1.5 hole 0.9: 2(2.54,0)
  silkscreen extent -1.27,-1.27 3.81,1.27
HDR1X3 [mm] "Connector; Header; 3 Position"
  rect 1.5x1.5 hole 0.9: 1(0,0)
  round 1.5 hole 0.9: 2(2.54,0) 3(5.08,0)
  silkscreen extent -1.27,-1.27 6.35,1.27
HDR1X4 [mm] "Connector; Header; 4 Position"
  rect 1.5x1.5 hole 0.9: 1(0,0)
  round 1.5 hole 0.9: 2(2.54,0) 3(5.08,0) 4(7.62,0)
  silkscreen extent -1.27,-1.27 8.89,1.27
HDR1X5 [mm] "Connector; Header; 5 Position"
  rect 1.5x1.5 hole 0.9: 1(0,0)
  round 1.5 hole 0.9: 2(2.54,0) 3(5.08,0) 4(7.62,0) 5(10.16,0)
  silkscreen extent -1.27,-1.27 11.43,1.27
HDR1X12 [mm] "Connector; Header; 12 Position"
  rect 1.5x1.5 hole 0.9: 1(0,0)
  round 1.5 hole 0.9: 2(2.54,0) 3(5.08,0) 4(7.62,0) 5(10.16,0) 6(12.7,0) 7(15.24,0) 8(17.78,0) 9(20.32,0) 10(22.86,0) 11(25.4,0) 12(27.94,0)
  silkscreen extent -1.27,-1.27 29.21,1.27
I_ON1 [mil]
  rect 101.26x95 smd: 1(-9.23,-66.67) 2(-9.23,48.29)
  silkscreen extent -80,-121 60,102
IDC10 [mil]
  rect 62x62 hole 38: 1(229,45)
  round 62 hole 38: 2(229,-55) 3(129,45) 4(129,-55) 5(29,45) 6(29,-55) 7(-71,45) 8(-71,-55) 9(-171,45) 10(-171,-55)
  silkscreen extent -221,-105 279,95
L3R3 [mm]
  rect 2x4.2 smd: 1(2.142,-0.213) 2(-1.878,-0.223)
  silkscreen extent -3.08,-2.7 3.32,2.3
L100uH [mm]
  rect 5x7 smd: 1(3.912,0.025) 2(-4.184,0.152)
  silkscreen extent -7.59,-4.06 7.39,4.45
lm2596 [mm]
  rect 10.8x10.41 smd: 0(-0.301,2.587)
  rect 1.07x2.15 smd: 1(-3.701,-5.613) 2(-2.001,-5.613) 3(-0.301,-5.613) 4(1.399,-5.613) 5(3.099,-5.613)
  silkscreen extent -5.5,-6.61 5.1,-3.31
LQFP64_M [mm]
  oval 0.3x2.1 smd: 1(3.81,5.588) 2(3.31,5.588) 3(2.81,5.588) 4(2.31,5.588) 5(1.81,5.588) 6(1.31,5.588) 7(0.81,5.588) 8(0.31,5.588) 9(-0.19,5.588) 10(-0.69,5.588) 11(-1.19,5.588) 12(-1.69,5.588) 13(-2.19,5.588) 14(-2.69,5.588) 15(-3.19,5.588) 16(-3.69,5.588) 33(-3.69,-5.612) 34(-3.19,-5.612) 35(-2.69,-5.612) 36(-2.19,-5.612) 37(-1.69,-5.612) 38(-1.19,-5.612) 39(-0.69,-5.612) 40(-0.19,-5.612) 41(0.31,-5.612) 42(0.81,-5.612) 43(1.31,-5.612) 44(1.81,-5.612) 45(2.31,-5.612) 46(2.81,-5.612) 47(3.31,-5.612) 48(3.81,-5.612)
  oval 2.1x0.3 smd: 17(-5.54,3.738) 18(-5.54,3.238) 19(-5.54,2.738) 20(-5.54,2.238) 21(-5.54,1.738) 22(-5.54,1.238) 23(-5.54,0.738) 24(-5.54,0.238) 25(-5.54,-0.262) 26(-5.54,-0.762) 27(-5.54,-1.262) 28(-5.54,-1.762) 29(-5.54,-2.262) 30(-5.54,-2.762) 31(-5.54,-3.262) 32(-5.54,-3.762) 49(5.66,-3.762) 50(5.66,-3.262) 51(5.66,-2.762) 52(5.66,-2.262) 53(5.66,-1.762) 54(5.66,-1.262) 55(5.66,-0.762) 56(5.66,-0.262) 57(5.66,0.238) 58(5.66,0.738) 59(5.66,1.238) 60(5.66,1.738) 61(5.66,2.238) 62(5.66,2.738) 63(5.66,3.238) 64(5.66,3.738)
  silkscreen extent -4.09,-4.16 4.63,5.71
SIP3-5.08mm [mm]
  rect 3x3 hole 2: 1(0,0)
  round 3 hole 2: 2(5.08,0) 3(10.16,0)
  silkscreen extent -2.54,-2.54 12.7,2.54
SO8#1 [mm]
  oval 0.6x2.2 smd: 1(-1.727,-2.4) 2(-0.457,-2.4) 3(0.813,-2.4) 4(2.083,-2.4) 5(2.083,2.4) 6(0.813,2.4) 7(-0.457,2.4) 8(-1.727,2.4)
  silkscreen extent -2.7,-2.52 2.68,0.9, body extent -2.32,-2 2.68,2, height 1.7
SO8#2 [mm]
  oval 0.6x2.8 smd: 1(-1.727,-2.4) 2(-0.457,-2.4) 3(0.813,-2.4) 4(2.083,-2.4) 5(2.083,2.4) 6(0.813,2.4) 7(-0.457,2.4) 8(-1.727,2.4)
  silkscreen extent -2.7,-2.52 2.68,0.9, body extent -2.32,-2 2.68,2, height 1.7
SOP14 [mm]
  rect 2.5x0.45 smd: 1(0,0)
  oval 2.5x0.45 smd: 2(0,-1.27) 3(0,-2.54) 4(0,-3.81) 5(0,-5.08) 6(0,-6.35) 7(0,-7.62) 8(6,-7.62) 9(6,-6.35) 10(6,-5.08) 11(6,-3.81) 12(6,-2.54) 13(6,-1.27) 14(6,0)
  silkscreen extent 2.08,-8.25 3.92,0.64
SOT89-M [mm]
  rect 1.6x0.6 smd: 1(1.519,-1.373) 3(1.519,1.627)
  oct 3.4x2 smd: 2(-1.381,0.127)
  rect 2x0.7 smd: 2(1.319,0.127)
  silkscreen extent -1.68,-2.35 1.69,2.43, body extent -1.68,-2.17 0.92,2.43, height 1.6
SOT89M [mm] "SOT89, 3-Leads, Body 4.5x2.4 mm, Pitch 1.5mm, Lead Span 4.1mm, IPC Low Density"
  rect 1.6x0.6 smd: 1(-1.9,1.5) 3(-1.9,-1.5)
  rect 2x0.7 smd: 2(-1.7,0)
  oct 3.4x2 smd: 2(1,0)
  silkscreen extent -2.07,-2.3 1.3,2.48, body extent -1.3,-2.3 1.3,2.3, height 1.6
SOT223 [mm]
  rect 2.7x1 smd: 1(-2.95,2.3) 2(-2.95,0) 3(-2.95,-2.3)
  rect 2.7x3.3 smd: 4(2.95,0)
  silkscreen extent -3.07,-3.35 1.3,3.48, body extent -1.85,-3.35 1.85,3.35, height 1.7
TEST#1 [mil]
  round 60 hole 32: 1(-0.52,1.03)
  silkscreen extent -41,-39 39,41
TEST#2 [mil]
  oval 60x59.06 hole 32: 1(-0.52,1.03)
  silkscreen extent -41,-39 39,41
VQFN32 [mm]
  oval 1.7x0.28 smd: 1(2.94,-2.203)
  rect 1.7x0.28 smd: 2(2.94,-1.703) 3(2.94,-1.203) 4(2.94,-0.703) 5(2.94,-0.203) 6(2.94,0.297) 7(2.94,0.797) 8(2.94,1.297) 17(-2.85,1.297) 18(-2.85,0.797) 19(-2.85,0.297) 20(-2.85,-0.203) 21(-2.85,-0.703) 22(-2.85,-1.203) 23(-2.85,-1.703) 24(-2.85,-2.203)
  rect 0.28x1.7 smd: 9(1.795,2.447) 10(1.295,2.447) 11(0.795,2.447) 12(0.295,2.447) 13(-0.205,2.447) 14(-0.705,2.447) 15(-1.205,2.447) 16(-1.705,2.447) 25(-1.705,-3.353) 26(-1.205,-3.353) 27(-0.705,-3.353) 28(-0.205,-3.353) 29(0.295,-3.353) 30(0.795,-3.353) 31(1.295,-3.353) 32(1.795,-3.353)
  rect 3x3 hole 2: 33(0.082,-0.475)
  silkscreen extent -4.08,-4.57 4.13,3.64
XTAL_8M [mil]
  round 80 hole 53: 1(-100.02,-0.16) 2(99.98,-0.17)
  silkscreen extent -214,-89 215,88

## Part data
BOOT1: library part CON3, "Connector"
C1 C2 C5 C7 C9 C10 C11 C12 C13 C14 C15 C16 C17 C18 C19 C20 C21 C22 C23 C25 C26 C27 C28 C29 C30 C31 C32 C33 C35 C36 C37 C38 C147 C148 C149 C150 C153 C154: library part Cap, "Capacitor"
C3 C4 C6 C8 C24 C34 C45 C46: library part "Cap Pol2", "Polarized Capacitor (Axial)"
C39 C47 C48 C49 C50 C51 C52 C53 C54 C55 C56 C57 C58 C59 C60 C61 C62 C63 C64 C65 C66 C67 C68 C69 C70 C71 C72 C73 C74 C75 C76 C77 C78 C79 C80 C81 C82 C83 C84 C85 C86 C87 C88 C89 C90 C93 C94 C95 C96 C97 C98 C99 C100 C101 C102 C103 C104 C105 C106 C107 C108 C109 C110 C111 C112 C116 C120 C121 C122 C123 C124 C125 C126 C127 C128 C129 C130 C131 C132 C133 C134 C136 C137 C139 C140 C141 C142 C143 C144 C145 C146: library part CAP, "Capacitor"
C40 C41 C42 C43 C44: library part C
C91 C92 C113 C114 C115 C117 C118 C119 C135 C138 C155: library part "CAPACITOR POL", "Capacitor"
C151 C152: "Capacitor"
D8: library part DIODE, "Diode"
J1: library part "HEADER 5X2"
J2: "Connector"
J4 J5 J6 J7: library part I_ON
JP1: library part CON4, "Connector"
L1 L2: library part L
L3: library part INDUCTOR
P1 P2 P3 P4 P5 P6 P22 P24 P26: "Header, 2-Pin, Right Angle"
P7: "Header, 5-Pin"
P8: "Header, 4-Pin"
P9: "Header, 12-Pin"
P11: library part "Header 3", "Header, 3-Pin"
R1 R2 R3 R4 R5 R6 R7 R9 R10 R11 R12 R13 R14 R15 R16 R17 R18 R19 R20 R21 R22 R23 R24 R25 R26 R27 R28 R29 R30 R31 R32 R33 R34 R35 R36 R37 R38 R39 R40 R41 R42 R43 R44 R45 R46 R47 R48 R49 R50 R51 R52 R53 R54 R55 R56 R57 R58 R59 R60 R61 R62 R63 R64 R65 R68 R69 R71 R72 R101 R102 R103 R104 R105 R106 R107 R108 R109 R124 R125 R128: library part Res2, "Resistor"
R8 R73 R88 R110 R111 R112 R113 R114 R115 R116 R117 R118 R119 R120 R121 R122 R123 R126 R127 R129 R130 R131 R132 R133 R134 R135: "Resistor"
R66 R70 R86: library part Res1, "Resistor"
R67 R87: library part res1, "Resistor"
R74 R75 R76 R77 R78 R79 R80 R81 R82 R83 R84 R85 R89 R90 R91 R92 R93 R94 R95 R96 R97 R98 R99 R100: library part RES2
T7 T9 T11 T12 T14 T15 T16 T17 T18 T19 T20 T21 T22 T23: library part TEST
U16: "STM32 ARM-based 32-bit MCU with 128 Kbytes Flash, 64-pin LQFP, Industrial Temperature"
U18: "Cyclone IV Family FPGA, 2V Core, 292 I/O Pins, 4 PLLs, 484-Pin FBGA, Speed Grade 7, Industrial Grade"
U19: library part OSC
U20: library part EPCS4
U21: library part 24C02
U22: library part TPS650243
U28: library part LM2596-5
Y1: library part XTAL, "Crystal Oscillator"

## Via types
v1: diameter 196.85, hole 118.11, Top Layer to Bottom Layer, 6 vias

## Nets (pads, with @x,y where several pads share a name; then routed paths per layer and width w, separated by ;. In a path a pad name is that pad's centre, name@x,y a point inside that pad or via, vN(x,y) a via of type N, cw(c..) or ccw(c..) an arc to the next point about the centre after c; other vN are vias at no path point)
3V3: C48.1 C49.1 C50.1 C51.1 C52.1 C53.1 JP1.1 P8.1 R6.1 R67.2 R70.2 R86.2 R87.1 R112.2 R123.2 U16.1 U16.13 U16.19 U16.32 U16.48 U16.64 U21.8
5V: J2.1
+1.2V: C75.2 C76.2 C77.2 C78.2 C79.2 C80.2 C81.2 C82.2 C83.2 C84.2 C85.2 C86.2 C87.2 C88.2 C89.2 C90.2 C95.2 C96.2 C97.2 C98.2 C99.2 C100.2 C101.2 C102.2 C103.2 C104.2 C105.2 C106.2 C107.2 C108.2 C109.2 C110.2 C111.2 C113.1 C114.1 C115.1 J6.2 T17.1 T18.1 U18.E17 U18.F6 U18.G8 U18.G10 U18.G12 U18.G14 U18.G16 U18.H9 U18.H11 U18.H15 U18.J7 U18.J8 U18.J10 U18.J11 U18.J12 U18.J13 U18.J14 U18.J16 U18.J17 U18.K8 U18.K9 U18.K14 U18.K15 U18.K17 U18.L7 U18.L9 U18.L14 U18.L16 U18.M8 U18.M9 U18.M14 U18.M15 U18.N7 U18.N9 U18.N14 U18.N16 U18.P7 U18.P9 U18.P10 U18.P11 U18.P12 U18.P13 U18.P14 U18.P15 U18.P17 U18.R6 U18.R8 U18.R10 U18.R12 U18.R15 U18.T7 U18.T9 U18.T11 U18.T13 U18.U6 U18.U8 U18.V7 U18.V17
+2.5V: C136.2 C137.2 C138.1 C140.2 C141.2 C142.2 C143.2 C144.2 C145.2 C146.2 J7.2 R75.1 T21.1 U18.F18 U18.G6 U18.T6 U18.U18
+3.3V: C39.2 C40.2 C54.2 C55.2 C56.2 C57.2 C60.2 C61.2 C62.2 C63.2 C64.2 C65.2 C66.2 C67.2 C68.2 C69.2 C70.2 C71.2 C72.2 C73.2 C74.2 C117.1 C118.1 C119.1 C120.2 C121.2 C122.2 C123.2 C124.2 C125.2 C126.2 C127.2 C128.2 C129.2 C130.2 C131.2 C132.2 C133.2 C134.2 C135.1 J1.6 J5.2 R81.1 R82.1 R83.2 R84.2 R88.2 R129.2 R130.2 R131.2 R132.2 R133.2 R134.2 R135.2 T19.1 T20.1 U18.A2 U18.A21 U18.AB2 U18.AB21 U18.D4 U18.D5 U18.D9 U18.D11 U18.D12 U18.D14 U18.D16 U18.E19 U18.F4 U18.G19 U18.K4 U18.L19 U18.N4 U18.P18 U18.U4 U18.V19 U18.W4 U18.W5 U18.W9 U18.W11 U18.W12 U18.W16 U18.W18 U18.Y19 U19.4 U20.3 U20.7 U20.8
+3.3V_AD: C6.1 C7.1 R6.2 R127.2 T9.1 U3.2 U3.4 U6.24 U10.24 U14.24
+5V1: C13.2 R60.1 R61.2 U5.7 U7.3
+5V2: C22.2 R62.1 R63.2 U9.7 U11.3
+5V3: C31.2 R64.1 R65.2 U13.7 U15.3
+5V_485: C1.2 C2.2 C3.1 C4.1 C155.1 L3.2 R124.1 U1.14 U2.14 U23.4 U23.14 U24.4 U24.14 U28.4
+5V_D: C91.1 C92.1 C93.2 C94.2 C148.1 C150.1 J4.1 R5.1 U3.3 U25.8 U26.8
+5VA: C9.2 C15.1 C16.1 R61.1 U6.5 U6.23 U8.2
+5VB: C18.2 R63.1 U10.5 U10.23
+5VC: C27.2 R65.1 U14.5 U14.23
+12V: C8.1 C33.1 C38.1 C45.1 C153.2 R8.2 R110.2 R128.1 U4.1 U12.3 U25.3 U25.4 U27.4
+VREFA: C17.1 C26.1 C35.1 U6.17 U8.6 U10.17 U14.17
-5V1: C14.2 R69.1 U5.4 U7.6
-5V2: C23.2 R71.1 U9.4 U11.6
-5V3: C32.2 R72.1 U13.4 U15.6
-12V: C36.2 C46.2 C154.1 D5.2 R113.2 U17.2 U26.1 U26.2 U27.11
ADC_IN0: R116.2 U16.14 U27.1
ADC_IN1: R120.2 U16.15 U27.7
ADC_IN2: R121.1 U16.16 U27.8
ADC_IN3: R117.1 U16.17 U27.14
AGND: C9.1 C11.2 C13.1 C14.1 C15.2 C16.2 C17.2 C18.1 C20.2 C22.1 C23.1 C26.2 C27.1 C29.2 C31.1 C32.1 C35.2 P22.1 P24.1 P26.1 R7.1 R12.1 R13.1 R15.1 R20.1 R25.1 R29.1 R30.1 R32.1 R37.1 R42.1 R46.1 R47.1 R49.1 R54.1 R59.1 R68.1 S1.2 S2.2 S3.2 T7.1 U6.6 U6.7 U6.11 U6.12 U6.13 U6.14 U6.18 U6.19 U6.21 U6.26 U6.33 U8.4 U10.6 U10.7 U10.11 U10.12 U10.13 U10.14 U10.18 U10.19 U10.21 U10.26 U10.33 U14.6 U14.7 U14.11 U14.12 U14.13 U14.14 U14.18 U14.19 U14.21 U14.26 U14.33
BOOT0: BOOT1.2 U16.60
CMD_BUS: R104.2 U18.D20
DGND: BOOT1.3 C1.1 C2.1 C3.2 C4.2 C5.2 C6.2 C7.2 C39.1 C40.1 C41.1 C42.1 C43.1 C44.1 C47.2 C48.2 C49.2 C50.2 C51.2 C52.2 C53.2 C54.1 C55.1 C56.1 C57.1 C58.2 C59.2 C60.1 C61.1 C62.1 C63.1 C64.1 C65.1 C66.1 C67.1 C68.1 C69.1 C70.1 C71.1 C72.1 C73.1 C74.1 C75.1 C76.1 C77.1 C78.1 C79.1 C80.1 C81.1 C82.1 C83.1 C84.1 C85.1 C86.1 C87.1 C88.1 C89.1 C90.1 C91.2 C92.2 C93.1 C94.1 C95.1 C96.1 C97.1 C98.1 C99.1 C100.1 C101.1 C102.1 C103.1 C104.1 C105.1 C106.1 C107.1 C108.1 C109.1 C110.1 C111.1 C112.2 C113.2 C114.2 C115.2 C116.2 C117.2 C118.2 C119.2 C120.1 C121.1 C122.1 C123.1 C124.1 C125.1 C126.1 C127.1 C128.1 C129.1 C130.1 C131.1 C132.1 C133.1 C134.1 C135.2 C136.1 C137.1 C138.2 C139.2 C140.1 C141.1 C142.1 C143.1 C144.1 C145.1 C146.1 C147.1 C148.2 C149.1 C150.2 C151.1 C152.1 C153.1 C154.2 D6.2 D7.2 J1.2 J1.10 J2.4 JP1.4 P7.5 P8.4 R7.2 R19.2 R36.2 R53.2 R66.2 R78.1 R79.1 R80.2 R91.2 R97.2 R99.2 R100.1 R111.2 R114.2 R115.1 R118.2 R119.1 R122.2 R125.2 T11.1 T22.1 T23.1 U1.1 U1.3 U1.6 U1.7 U2.1 U2.3 U2.6 U2.7 U3.1 U4.4 U6.22 U10.22 U14.22 U16.12 U16.18 U16.31 U16.47 U16.63 U18.A1 U18.A22 U18.AA2 U18.AA22 U18.AB1 U18.AB22 U18.C5 U18.C9 U18.C11 U18.C12 U18.C14 U18.C16 U18.D3 U18.E10 U18.E18 U18.E20 U18.F3 U18.F5 U18.F12 U18.F16 U18.G2 U18.G9 U18.G11 U18.G13 U18.G15 U18.G17 U18.G20 U18.H8 U18.H10 U18.H12 U18.H13 U18.H14 U18.H16 U18.J9 U18.J15 U18.K3 U18.K7 U18.K10 U18.K11 U18.K12 U18.K13 U18.K16 U18.L8 U18.L10 U18.L11 U18.L12 U18.L13 U18.L15 U18.L20 U18.M7 U18.M10 U18.M11 U18.M12 U18.M13 U18.N3 U18.N8 U18.N10 U18.N11 U18.N12 U18.N13 U18.N15 U18.N17 U18.P6 U18.P8 U18.P16 U18.P19 U18.R7 U18.R9 U18.R11 U18.R13 U18.T8 U18.T10 U18.T12 U18.T14 U18.U3 U18.U5 U18.U7 U18.U13 U18.V6 U18.V18 U18.V20 U18.W3 U18.Y5 U18.Y9 U18.Y11 U18.Y12 U18.Y16 U18.Y18 U18.Y20 U19.2 U20.4 U21.1 U21.2 U21.3 U21.4 U21.7 U22.2 U22.7 U22.13 U22.26 U22.31 U22.33 U23.1 U23.6 U23.7 U24.1 U24.6 U24.7 U25.5 U26.5
DIN_1A: R17.2 U18.E14
DIN_2A: R34.2 U18.E13
DIN_3A: R51.2 U18.E11
DOUT_1A: R14.2 U18.C15
DOUT_2A: R31.2 U18.D13
DOUT_3A: R48.2 U18.E12
FPGA_ASDO: C44.2 U18.H6 U20.5
FPGA_CONF_DONE: R82.2 U18.M18
FPGA_DATA0: R85.1 U18.K1
FPGA_DCLK: C42.2 U18.K2 U20.6
FPGA_LED1: D15.2 U18.AB18
FPGA_LED2: D14.2 U18.AA17
FPGA_LED3: D13.2 U18.AB17
FPGA_LED4: D12.2 U18.AA18
FPGA_LED5: D11.2 U18.AA19
FPGA_LED6: D10.2 U18.AB19
FPGA_LED7: D9.2 U18.W17
FPGA_LED8: D1.2 U18.Y17
FPGA_NCE: R80.1 U18.L3
FPGA_NCONFIG: R83.1 U18.K5
FPGA_NCSO: C43.2 U18.E2 U20.1
FPGA_NSTATUS: R84.1 U18.K6
FPGA_TCK: J1.1 R78.2 U18.L2
FPGA_TDI: J1.9 R77.1 U18.L5
FPGA_TDO: J1.3 U18.L4
FPGA_TEST1: P9.1 U18.J22
FPGA_TEST2: P9.2 U18.H22
FPGA_TEST3: P9.3 U18.H21
FPGA_TEST4: P9.4 U18.K18
FPGA_TEST5: P9.5 U18.J18
FPGA_TEST6: P9.6 U18.F22
FPGA_TEST7: P9.7 U18.F21
FPGA_TEST8: P9.8 U18.J20
FPGA_TEST9: P9.9 U18.J19
FPGA_TEST10: P9.10 U18.H20
FPGA_TEST11: P9.11 U18.H19
FPGA_TEST12: P9.12 U18.E22
FPGA_TMS: J1.5 R76.1 U18.L1
GPS_TIMER: R103.2 U18.F17
HMC5883_RDY: P7.4 U16.30
HMC5883_SCL: P7.3 U16.29
HMC5883_SDA: P7.1 U16.61
HMC5883_WSDA: P7.2 U16.62
JTCK: JP1.3 U16.49
JTMS: JP1.2 U16.46
MAIN_DATA: R105.1 U18.C20
MAIN_DATA_RXEN: R106.1 U18.B22
MAIN_DATA_TXEN: R102.1 U18.B21
MCLK_A: U6.30 U18.K22
MCLK_B: U10.30 U18.K19
MCLK_C: U14.30 U18.L21
MCU_FPGA_BAK1: U16.10 U18.E8
MCU_FPGA_BAK2: U16.11 U18.A5
MCU_FPGA_BAK3: U16.24 U18.B5
MCU_FPGA_BAK4: U16.25 U18.F10
MCU_FPGA_BAK5: U16.37 U18.C6
MCU_FPGA_BAK6: U16.38 U18.D7
MSEL0: R79.2 U18.K20 U18.L17 U18.M17
MSEL1: R81.2 U18.L18
NetBOOT1_1: BOOT1.1 R87.2
NetC5_1: C5.1 R5.2 R126.2 U4.6
NetC10_1: C10.1 C12.1 R9.2 R21.2 U5.6
NetC10_2: C10.2 R9.1 R13.2 U5.2
NetC11_1: C11.1 C12.2 U5.8
NetC19_1: C19.1 C21.1 R26.2 R38.2 U9.6
NetC19_2: C19.2 R26.1 R30.2 U9.2
NetC20_1: C20.1 C21.2 U9.8
NetC24_1: C24.1 C25.1 R60.2 R62.2 R64.2 U12.1
NetC28_1: C28.1 C30.1 R43.2 R55.2 U13.6
NetC28_2: C28.2 R43.1 R47.2 U13.2
NetC29_1: C29.1 C30.2 U13.8
NetC34_2: C34.2 C37.2 R69.2 R71.2 R72.2 U17.3
NetC41_2: C41.2 R85.2 U20.2
NetC112_1: C112.1 J5.1 L1.2 R90.1 U22.25
NetC116_1: C116.1 J6.1 L2.2 U22.1
NetC139_1: C139.1 J7.1 R96.2 R97.1 U22.16
NetC147_2: C147.2 U25.6
NetC149_2: C149.2 U26.6
NetD1_1: D1.1 R88.1
NetD2_1: D2.1 R112.1
NetD2_2: D2.2 U16.57
NetD3_1: D3.1 R123.1
NetD3_2: D3.2 U16.39
NetD4_1: D4.1 R8.1
NetD5_1: D5.1 R73.1
NetD6_1: D6.1 R126.1
NetD7_1: D7.1 R127.1
NetD8_2: D8.2 L3.1 U28.2
NetD9_1: D9.1 R129.1
NetD10_1: D10.1 R130.1
NetD11_1: D11.1 R131.1
NetD12_1: D12.1 R132.1
NetD13_1: D13.1 R133.1
NetD14_1: D14.1 R134.1
NetD15_1: D15.1 R135.1
NetJ1_4: J1.4 R75.2 R76.2 R77.2
NetJ4_2: J4.2 R89.1 R92.1 R93.1 R94.1 R95.1 R98.1 U22.4 U22.15 U22.28 U22.29
NetL1_1: L1.1 U22.27
NetL2_1: L2.1 U22.3
NetP1_1: P1.1 R1.1 U1.12
NetP1_2: P1.2 R1.2 U1.11
NetP2_1: P2.1 R2.1 U2.12
NetP2_2: P2.2 R2.2 U2.11
NetP3_1: P3.1 R101.1 U2.10
NetP3_2: P3.2 R101.2 U2.9
NetP4_1: P4.1 R3.2 U23.10
NetP4_2: P4.2 R3.1 U23.9
NetP5_1: P5.1 R107.2 U24.12
NetP5_2: P5.2 R107.1 U24.11
NetP6_1: P6.1 R4.2 U24.10
NetP6_2: P6.2 R4.1 U24.9
NetP11_1: P11.1 U26.3 U26.4
NetP11_3: P11.3 U25.1 U25.2
NetP22_2: P22.2 R21.1 R23.1
NetP24_2: P24.2 R38.1 R40.1
NetP26_2: P26.2 R55.1 R57.1
NetR10_1: R10.1 R15.2 U7.1
NetR11_2: R11.2 T1.1 U6.9
NetR12_2: R12.2 U7.2
NetR14_1: R14.1 U6.27
NetR16_1: R16.1 S1.1
NetR16_2: R16.2 R20.2 U5.3
NetR17_1: R17.1 U6.28
NetR18_1: R18.1 U6.31
NetR19_1: R19.1 U6.32
NetR22_1: R22.1 U6.25
NetR23_2: R23.2 U7.8
NetR24_2: R24.2 T2.1 U6.10
NetR25_2: R25.2 U7.7
NetR27_1: R27.1 R32.2 U11.1
NetR28_2: R28.2 T3.1 U10.9
NetR29_2: R29.2 U11.2
NetR31_1: R31.1 U10.27
NetR33_1: R33.1 S2.1
NetR33_2: R33.2 R37.2 U9.3
NetR34_1: R34.1 U10.28
NetR35_1: R35.1 U10.31
NetR36_1: R36.1 U10.32
NetR39_1: R39.1 U10.25
NetR40_2: R40.2 U11.8
NetR41_2: R41.2 T4.1 U10.10
NetR42_2: R42.2 U11.7
NetR44_1: R44.1 R49.2 U15.1
NetR45_2: R45.2 T5.1 U14.9
NetR46_2: R46.2 U15.2
NetR48_1: R48.1 U14.27
NetR50_1: R50.1 S3.1
NetR50_2: R50.2 R54.2 U13.3
NetR51_1: R51.1 U14.28
NetR52_1: R52.1 U14.31
NetR53_1: R53.1 U14.32
NetR56_1: R56.1 U14.25
NetR57_2: R57.2 U15.8
NetR58_2: R58.2 T6.1 U14.10
NetR59_2: R59.2 U15.7
NetR66_1: R66.1 U16.28
NetR74_1: R74.1 U19.3
NetR74_2: R74.2 U18.AB12
NetR89_2: R89.2 U22.23
NetR92_2: R92.2 U22.32
NetR93_2: R93.2 U22.20
NetR94_2: R94.2 U22.19
NetR95_2: R95.2 U22.18
NetR96_1: R96.1 R99.1 U22.11
NetR98_2: R98.2 U22.17
NetR100_2: R100.2 U22.24
NetR102_2: R102.2 R124.2 U2.4
NetR103_1: R103.1 U1.2 U23.5
NetR104_1: R104.1 U2.2 U24.5
NetR105_2: R105.2 U2.5 U24.2
NetR106_2: R106.2 R125.1 U24.3
NetR108_2: R108.2 U25.7
NetR109_2: R109.2 U26.7
NetR115_2: R115.2 R116.1 U27.2
NetR117_2: R117.2 R118.1 U27.13
NetR119_2: R119.2 R120.1 U27.6
NetR121_2: R121.2 R122.1 U27.9
NetR128_2: R128.2 U28.1
NetT12_1: T12.1 U18.N19
NetT14_1: T14.1 U18.AB11
NetT15_1: T15.1 U18.P20
NetT16_1: T16.1 U18.AA11
OUT1+: R10.2 R11.1 U7.4
OUT1-: R24.1 U7.5
OUT2+: R27.2 R28.1 U11.4
OUT2-: R41.1 U11.5
OUT3+: R44.2 R45.1 U15.4
OUT3-: R58.1 U15.5
REF_V2: R90.2 R91.1 U22.22
RST: C47.1 R67.1 U16.7
RX1: J2.3 U16.43
SCL: R70.1 U16.44 U21.6
SCLK_1A: R18.2 U18.F13
SCLK_2A: R35.2 U18.A14
SCLK_3A: R52.2 U18.F11
SDA: R86.1 U16.45 U21.5
SGND: C8.2 C24.2 C25.2 C33.2 C34.1 C36.1 C37.1 C38.2 C45.2 C46.1 C155.2 D4.2 D8.1 P11.2 R68.2 R73.2 U4.2 U12.2 U17.1 U28.3 U28.5
SPI1_MISO: U16.22 U18.E6
SPI1_MOSI: U16.23 U18.E5
SPI1_NSS: U16.20 U18.G7
SPI1_SCK: U16.21 U18.F9
SYNC_1A: R22.2 U18.B16
SYNC_2A: R39.2 U18.C13
SYNC_3A: R56.2 U18.B13
TEST_I+: R108.1 U27.10
TEST_I-: R109.1 U27.12
TEST_V+: C151.2 R110.1 R111.1 U27.3
TEST_V-: C152.2 R113.1 R114.1 U27.5
TMP_DATA: P8.2 U16.3
TX1: J2.2 U16.42
X1: C58.1 U16.5 Y1.2
X2: C59.1 U16.6 Y1.1
pads on no net: J1.7 J1.8 P8.3 U1.4 U1.5 U1.8 U1.9 U1.10 U1.13 U2.8 U2.13 U5.1 U5.5 U6.1 U6.2 U6.3 U6.4 U6.8 U6.15 U6.16 U6.20 U6.29 U8.1 U8.3 U8.5 U8.7 U8.8 U9.1 U9.5 U10.1 U10.2 U10.3 U10.4 U10.8 U10.15 U10.16 U10.20 U10.29 U13.1 U13.5 U14.1 U14.2 U14.3 U14.4 U14.8 U14.15 U14.16 U14.20 U14.29 U16.2 U16.4 U16.8 U16.9 U16.26 U16.27 U16.33 U16.34 U16.35 U16.36 U16.40 U16.41 U16.50 U16.51 U16.52 U16.53 U16.54 U16.55 U16.56 U16.58 U16.59 U18.A3 U18.A4 U18.A6 U18.A7 U18.A8 U18.A9 U18.A10 U18.A11 U18.A12 U18.A13 U18.A15 U18.A16 U18.A17 U18.A18 U18.A19 U18.A20 U18.AA1 U18.AA3 U18.AA4 U18.AA5 U18.AA6 U18.AA7 U18.AA8 U18.AA9 U18.AA10 U18.AA12 U18.AA13 U18.AA14 U18.AA15 U18.AA16 U18.AA20 U18.AA21 U18.AB3 U18.AB4 U18.AB5 U18.AB6 U18.AB7 U18.AB8 U18.AB9 U18.AB10 U18.AB13 U18.AB14 U18.AB15 U18.AB16 U18.AB20 U18.B1 U18.B2 U18.B3 U18.B4 U18.B6 U18.B7 U18.B8 U18.B9 U18.B10 U18.B11 U18.B12 U18.B14 U18.B15 U18.B17 U18.B18 U18.B19 U18.B20 U18.C1 U18.C2 U18.C3 U18.C4 U18.C7 U18.C8 U18.C10 U18.C17 U18.C18 U18.C19 U18.C21 U18.C22 U18.D1 U18.D2 U18.D6 U18.D8 U18.D10 U18.D15 U18.D17 U18.D18 U18.D19 U18.D21 U18.D22 U18.E1 U18.E3 U18.E4 U18.E7 U18.E9 U18.E15 U18.E16 U18.E21 U18.F1 U18.F2 U18.F7 U18.F8 U18.F14 U18.F15 U18.F19 U18.F20 U18.G1 U18.G3 U18.G4 U18.G5 U18.G18 U18.G21 U18.G22 U18.H1 U18.H2 U18.H3 U18.H4 U18.H5 U18.H7 U18.H17 U18.H18 U18.J1 U18.J2 U18.J3 U18.J4 U18.J5 U18.J6 U18.J21 U18.K21 U18.L6 U18.L22 U18.M1 U18.M2 U18.M3 U18.M4 U18.M5 U18.M6 U18.M16 U18.M19 U18.M20 U18.M21 U18.M22 U18.N1 U18.N2 U18.N5 U18.N6 U18.N18 U18.N20 U18.N21 U18.N22 U18.P1 U18.P2 U18.P3 U18.P4 U18.P5 U18.P21 U18.P22 U18.R1 U18.R2 U18.R3 U18.R4 U18.R5 U18.R14 U18.R16 U18.R17 U18.R18 U18.R19 U18.R20 U18.R21 U18.R22 U18.T1 U18.T2 U18.T3 U18.T4 U18.T5 U18.T15 U18.T16 U18.T17 U18.T18 U18.T19 U18.T20 U18.T21 U18.T22 U18.U1 U18.U2 U18.U9 U18.U10 U18.U11 U18.U12 U18.U14 U18.U15 U18.U16 U18.U17 U18.U19 U18.U20 U18.U21 U18.U22 U18.V1 U18.V2 U18.V3 U18.V4 U18.V5 U18.V8 U18.V9 U18.V10 U18.V11 U18.V12 U18.V13 U18.V14 U18.V15 U18.V16 U18.V21 U18.V22 U18.W1 U18.W2 U18.W6 U18.W7 U18.W8 U18.W10 U18.W13 U18.W14 U18.W15 U18.W19 U18.W20 U18.W21 U18.W22 U18.Y1 U18.Y2 U18.Y3 U18.Y4 U18.Y6 U18.Y7 U18.Y8 U18.Y10 U18.Y13 U18.Y14 U18.Y15 U18.Y21 U18.Y22 U19.1 U22.5 U22.6 U22.8 U22.9 U22.10 U22.12 U22.14 U22.21 U22.30 U23.2 U23.3 U23.8 U23.11 U23.12 U23.13 U24.8 U24.13 U28.0
copper on no net:
  other v1: 9845,2715 5660,2720 1885,2745 1950,4060 9800,4095 5565,4115

## Keep-outs
Keep-Out Layer:
  lines w8: 9730,4250 1625,4250 1625,2560 10430,2560

## Silkscreen, mask and mechanical layers (free items; w line width, h text height)
Top Overlay:
  text "SCLK" at 3845,4645 h25
  text "SCLK" at 3675,4620 h25
  text "SCLK" at 4090,4600 h25
  text "DIN" at 3850,4535 h25
  text "DIN" at 3685,4525 h25
  text "DOUT" at 3845,4455 h25
  text "DIN" at 4090,4440 h25
  text "DOUT" at 3675,4425 h25
  text "DOUT" at 4095,4395 h25
  text "SYNC" at 3825,4370 h25
  text "SYNC" at 3675,4320 h25
  text "SYNC" at 4090,4295 h25
  text "+12V" at 9715,4170 h25
  text "SGND" at 9710,3960 h25
  text "+IN1" at 1980,3790 h25
  text "AGND" at 1955,3670 h25
  text "+3.3V" at 6105,3350 h25 r90
  text "+IN2" at 1985,3310 h25
  text "AGND" at 1995,3185 h25
  text "+IN3" at 1970,2755 h25
  text "AGND" at 1960,2620 h25
  text "+3.3V" at 4270,2090 h25